# Altium PCB HC01.PcbDoc
Units mil, origin at the board's own origin, x right, y up, seen from the top; angles counter-clockwise.
Board outline 1085.03 x 1490.03 mil, 2 copper layers (Top Layer, Bottom Layer); 8 components, 9 nets, 71 pads, 11 vias.
Unrouted connection lines stored in the file: 2.
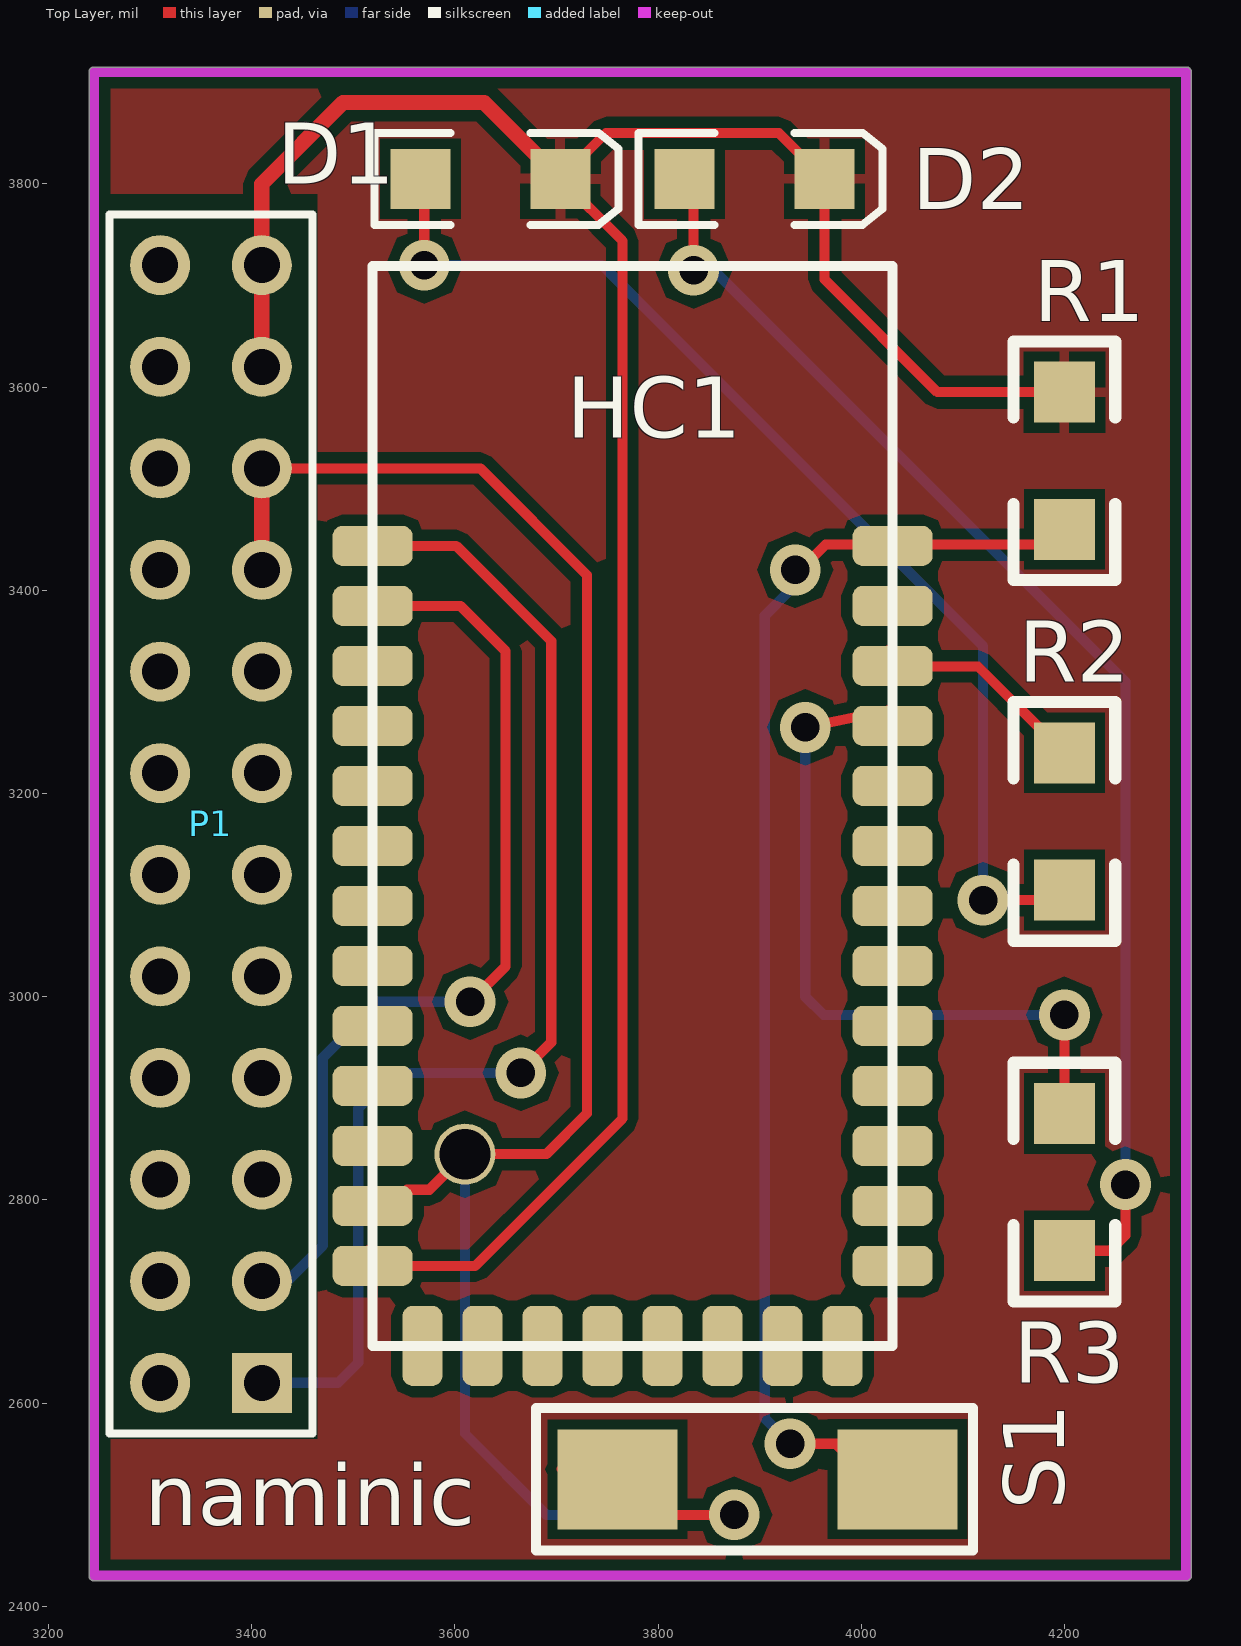
[diagram p0: Top Layer view]
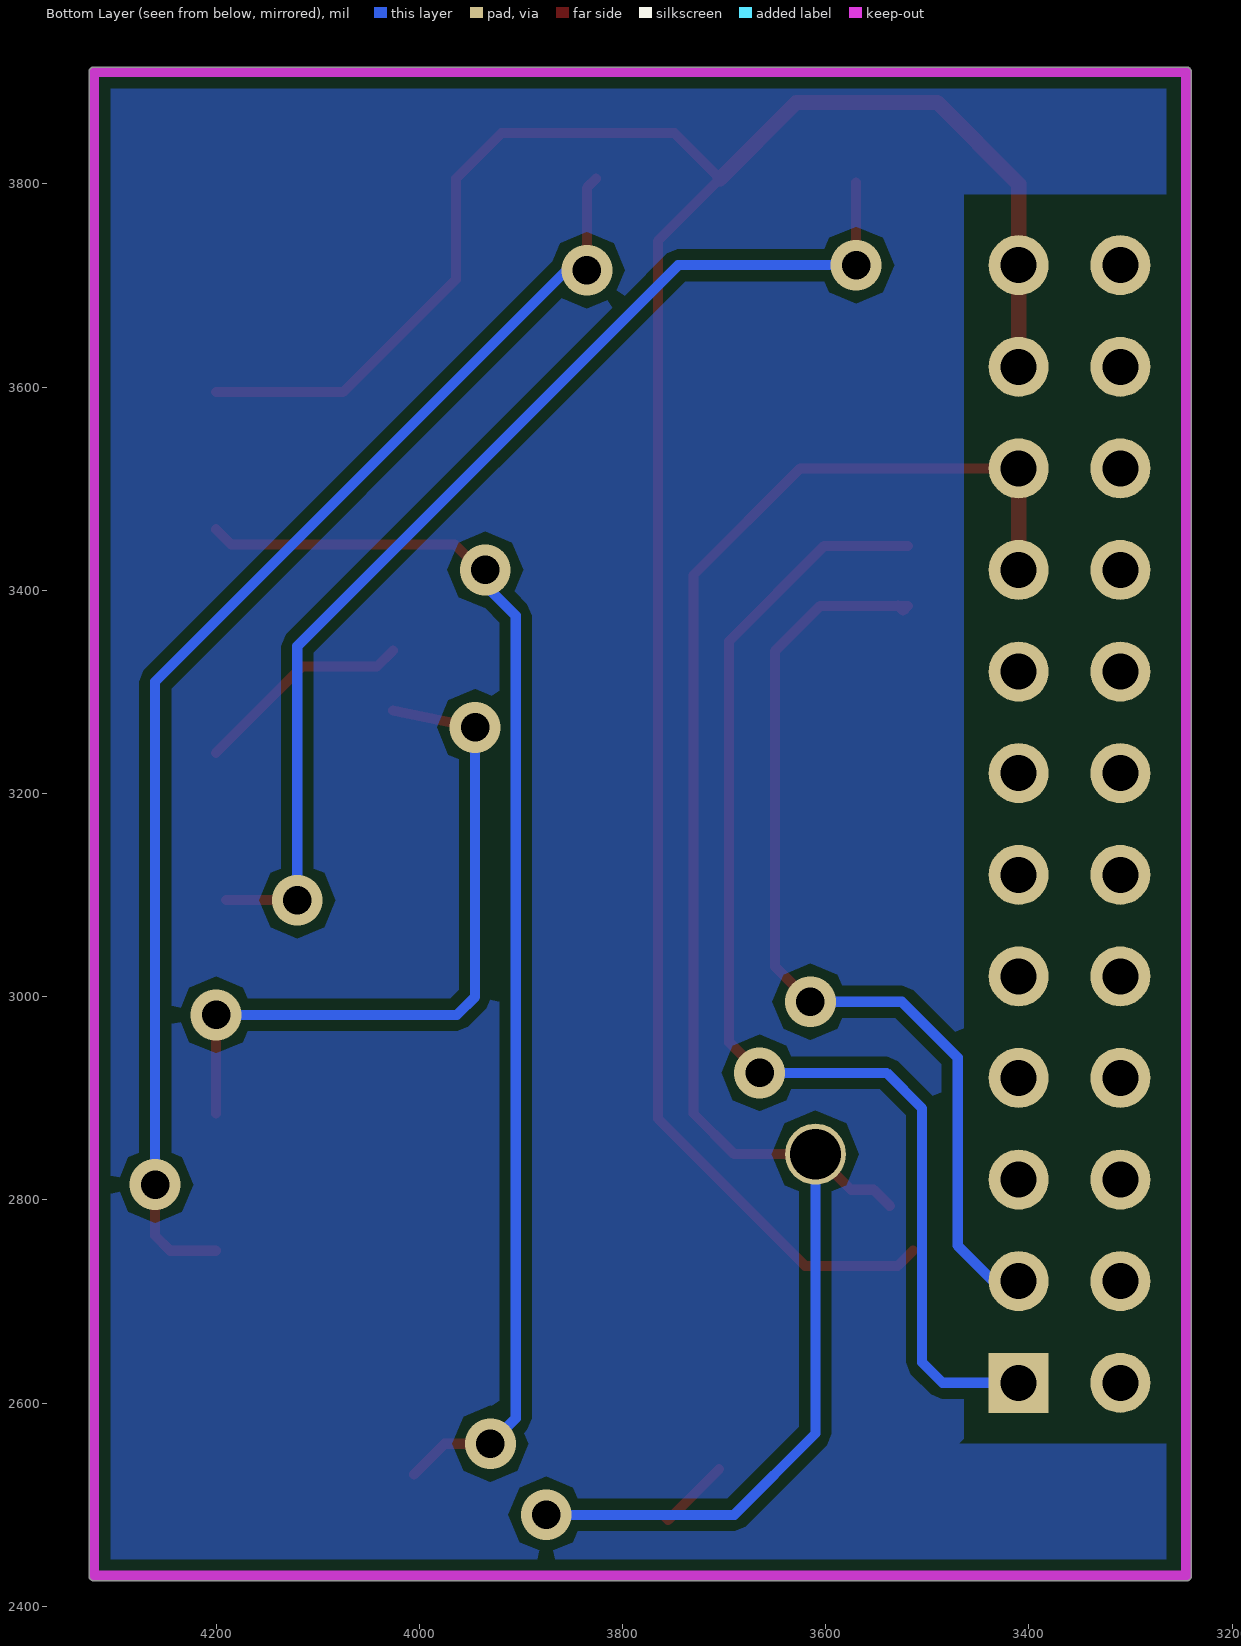
[diagram p1: Bottom Layer view, seen from below]
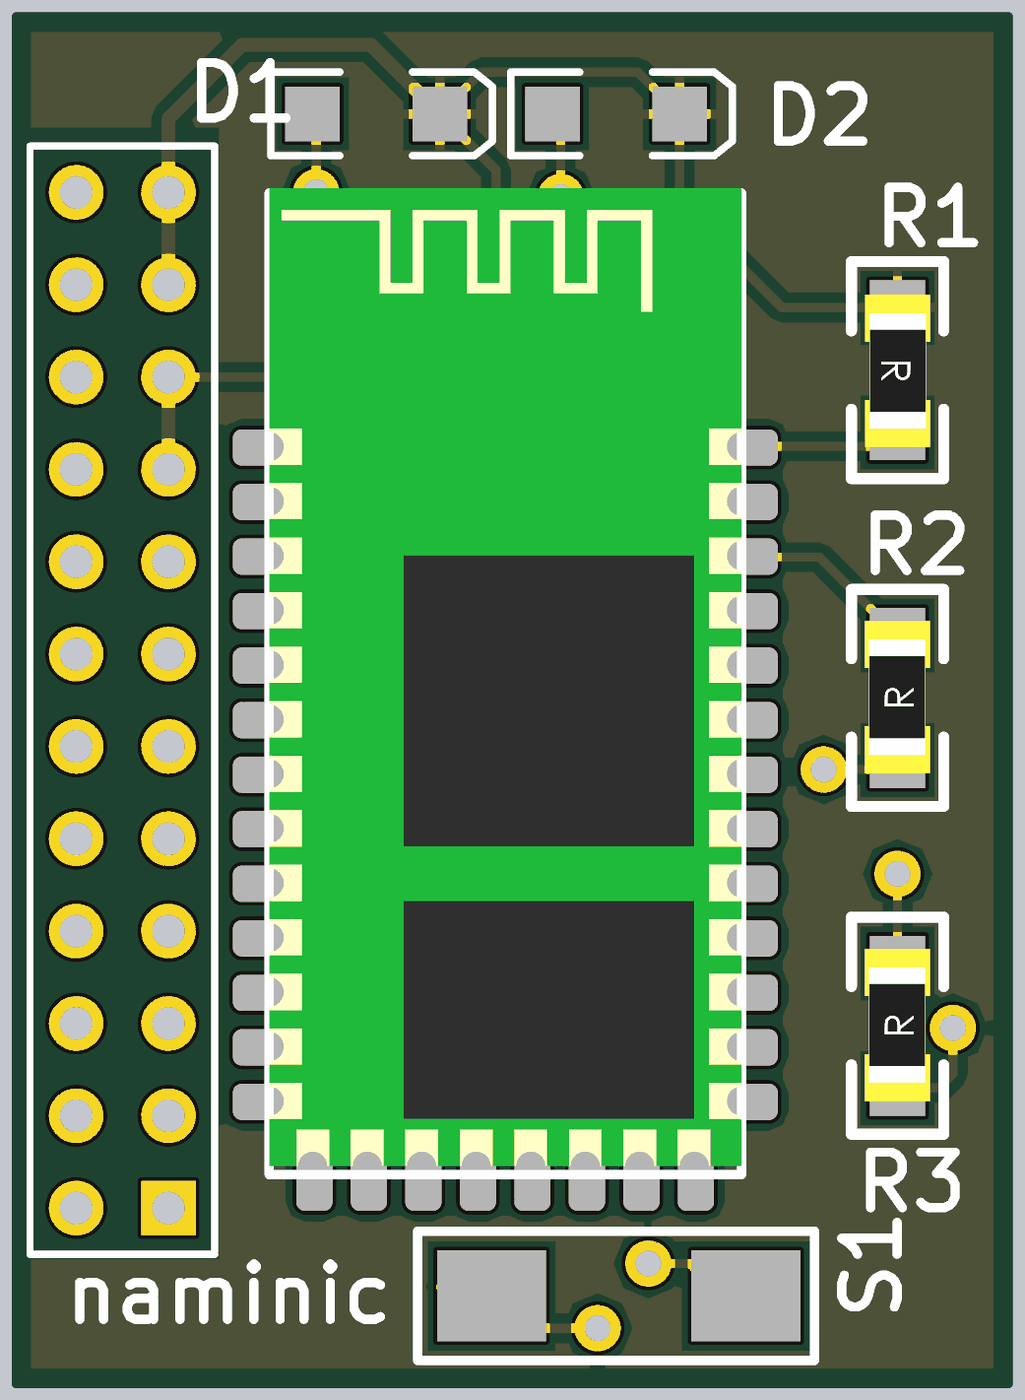
[diagram p2: 3D render of the assembled board from above, using the file's embedded part models]

## Layer stack, top to bottom
Top Layer: signal copper 1.4
Dielectric: dielectric 12.6, FR-4, Dk 4.8
Bottom Layer: signal copper 1.4

## Board outline
3239.99,2430 3239.99,3910 cw(c3245,3910) 3245,3915.01 4320,3915.01 cw(c4320,3910) 4325.02,3910 4325.02,2430 cw(c4320,2430) 4320,2424.99 3245,2424.99 cw(c3245,2430)

## Design rules (kind name [scope] priority, off if disabled: settings)
Clearance [All] p1: gap=10
PolygonConnect [All] p1: connectstyle=Relief reliefconductorwidth=10 reliefentries=4 polygonreliefangle="90 Angle"
RoomDefinition Sheet1 [InComponentClass('Sheet1')] p1: confinementstyle=ConfineIn formatcopy=TRUE lockcomponents=FALSE outline 0,0 2000,0 2000,1000 0,1000
RoutingVias [All] p1: holewidth=28 width=50 viastyle="Through Hole" minholewidth=28 minwidth=50 maxholewidth=28 maxwidth=50
SilkscreenOverComponentPads SilkToSolderMaskClearance [IsPad] p1: minsilkscreentomaskgap=10
SolderMaskExpansion [All] p1: expansion=4
Width [All] p1: maxlimit=10 minlimit=10 preferedwidth=10
27 further rules are at their usual default settings.

## Components (designator, comment, footprint, x,y, rotation, side; value= is the part's Value field where it differs from the comment)
D1 "LED2" 3.2X1.6X1.1 3635,3805 r0 top
D2 "LED2" 3.2X1.6X1.1 3895,3805 r0 top
HC1 "HC-05 Bluetooth" HC-05 3775,3050 r0 top
P1 "Header 12X2" HDR2X12 3410,2620 r90 top
R1 "10K" 1206 4200,3595 r270 top
R2 "180R" 1206 4200,3105 r90 top
R3 "180R" 1206 4200,2750 r90 top
S1 "KEY" SW-SMD 3760,2525 r0 top

## Footprints (in the part's own frame and the unit in brackets; to place one, negate y for a bottom-side part, rotate by r counter-clockwise, add the part's x,y. Pads: shape width x height; smd on the part's side, far side on the other; paste and mask are expansions set on the pad)
3.2X1.6X1.1 [mm] "SMT LED; 2 Flat Leads"
  rect 1.5x1.5 smd: 1(-1.75,0) 2(1.75,0)
  silkscreen extent -2.9,-1.15 3.2,1.15
1206 [mil]
  rect 60x60 smd: 1(0,0) 2(135,0)
  silkscreen extent -50,-50 185,50, body extent -14,-35 151,36, height 25
HC-05 [mm]
  rrect50% 2x1 smd: 1(-6.5,10) 2(-6.5,8.5) 3(-6.5,7) 4(-6.5,5.5) 5(-6.5,4) 6(-6.5,2.5) 7(-6.5,1) 8(-6.5,-0.5) 9(-6.5,-2) 10(-6.5,-3.5) 11(-6.5,-5) 12(-6.5,-6.5) 13(-6.5,-8) 22(6.5,-8) 23(6.5,-6.5) 24(6.5,-5) 25(6.5,-3.5) 26(6.5,-2) 27(6.5,-0.5) 28(6.5,1) 29(6.5,2.5) 30(6.5,4) 31(6.5,5.5) 32(6.5,7) 33(6.5,8.5) 34(6.5,10)
  rrect50% 1x2 smd: 14(-5.254,-10) 15(-3.754,-10) 16(-2.254,-10) 17(-0.754,-10) 18(0.746,-10) 19(2.246,-10) 20(3.746,-10) 21(5.246,-10)
  silkscreen extent -6.5,-10 6.5,17, body extent -6.5,-9.77 6.5,17.13, height 2.5
HDR2X12 [mm] "Connector; Header; 12x2 Position"
  rect 1.5x1.5 hole 0.9: 1(0,0)
  round 1.5 hole 0.9: 2(0,2.54) 3(2.54,0) 4(2.54,2.54) 5(5.08,0) 6(5.08,2.54) 7(7.62,0) 8(7.62,2.54) 9(10.16,0) 10(10.16,2.54) 11(12.7,0) 12(12.7,2.54) 13(15.24,0) 14(15.24,2.54) 15(17.78,0) 16(17.78,2.54) 17(20.32,0) 18(20.32,2.54) 19(22.86,0) 20(22.86,2.54) 21(25.4,0) 22(25.4,2.54) 23(27.94,0) 24(27.94,2.54)
  silkscreen extent -1.27,-1.27 29.21,3.81
SW-SMD [mm]
  rect 3x2.5 smd: 1(0,0) 2(7,0)
  silkscreen extent -2.03,-1.78 8.89,1.78

## Part data
D1 D2: "Typical RED, GREEN, YELLOW, AMBER GaAs LED"
P1: "Header, 12-Pin, Dual row"
R1 R2 R3: library part Res3, "Resistor"
S1: library part SW-SPST, "Single-Pole, Single-Throw Switch"

## Free pads (board coordinates)
  round 60 hole 50: 2(3610,2845)

## Via types
v1: diameter 50, hole 28, Top Layer to Bottom Layer, 11 vias

## Nets (pads, with @x,y where several pads share a name; then routed paths per layer and width w, separated by ;. In a path a pad name is that pad's centre, name@x,y a point inside that pad or via, vN(x,y) a via of type N, cw(c..) or ccw(c..) an arc to the next point about the centre after c; other vN are vias at no path point)
3.3V: HC1.12 P1.17 P1.19 pad.2 S1.1 | length 1990.2
  Top Layer w10: P1.19 3625,3520 3730,3415 3730,2885 3690,2845 pad.2 3575,2810 3552.81,2810 HC1.12@3536.91,2794.09 ; S1.1@3705,2535 3755,2485 3760,2490 v1(3875,2490)
  Top Layer w15: P1.17 P1.19
  Bottom Layer w10: pad.2 3610,2570 3690,2490 v1(3875,2490)
GND: D1.2 D2.2 HC1.13 P1.21 P1.23 R1.1 | length 2483.9
  Top Layer w10: HC1.13@3514.09,2750.04 3529.13,2735 3620,2735 3765,2880 3765,3743.9 D1.2 3748.9,3850 3918.9,3850 D2.2 3963.9,3706.1 4075,3595 R1.1
  Top Layer w15: P1.21 P1.23 3410,3800 3490,3880 3628.9,3880 D1.2
HC01-RX: HC1.2 P1.3 | length 936.2
  Top Layer w10: HC1.2 3605.35,3384.65 3650,3340 3650,3030 v1(3615,2995)
  Bottom Layer w10: P1.3 3435,2720 3470,2755 3470,2940 3525,2995 v1(3615,2995)
HC01-TX: HC1.1 P1.1 | length 1179.9
  Top Layer w10: HC1.1 3601.3,3443.7 3695,3350 3695,2955 v1(3665,2925)
  Bottom Layer w10: P1.1 3485,2620 3505,2640 3505,2890 3540,2925 v1(3665,2925)
NetD1_1: D1.1 R2.1 | length 1106.4
  Top Layer w10: 3570,3720 D1.1@3570,3801.1 ; v1(4120,3095) R2.1@4190,3095
  Bottom Layer w10: 3570,3720 3745,3720 4120,3345 v1(4120,3095)
NetD2_1: D2.1 R3.1 | length 1284
  Top Layer w10: 3835,3715 D2.1@3835,3795 ; R3.1 4245,2750 4260,2765 v1(4260,2815)
  Bottom Layer w10: 3835,3715 3855,3715 4260,3310 v1(4260,2815)
NetHC1_31: HC1.31 R3.2 | length 707
  Top Layer w10: v1(3945,3265) HC1.31@4025.91,3281.54 ; R3.2 v1(4200,2982)
  Bottom Layer w10: v1(3945,3265) 3945,3000 3963,2982 v1(4200,2982)
NetHC1_32: HC1.32 R2.2 | length 215.8
  Top Layer w10: HC1.32@4025.91,3340.59 4041.5,3325 4115,3325 R2.2
NetHC1_34: HC1.34 R1.2 S1.2 | length 1232.6
  Top Layer w10: v1@3915,2560 3975,2560 S1.2@4005,2530 ; v1@3945,3425 3965,3445 4185,3445 R1.2
  Bottom Layer w10: v1(3930,2560) 3905,2585 3905,3375 v1@3930,3400
  other v1: 3935,3420
pads on no net: HC1.3 HC1.4 HC1.5 HC1.6 HC1.7 HC1.8 HC1.9 HC1.10 HC1.11 HC1.14 HC1.15 HC1.16 HC1.17 HC1.18 HC1.19 HC1.20 HC1.21 HC1.22 HC1.23 HC1.24 HC1.25 HC1.26 HC1.27 HC1.28 HC1.29 HC1.30 HC1.33 P1.2 P1.4 P1.5 P1.6 P1.7 P1.8 P1.9 P1.10 P1.11 P1.12 P1.13 P1.14 P1.15 P1.16 P1.18 P1.20 P1.22 P1.24
copper on no net: | length 86.2
  Top Layer w10: 3519.09,3384.65 3523.74,3380 3528.74,3385 ; 3826.1,3805 3835,3796.1
  Bottom Layer w10: v1(3835,3715) v1@3855,3715 ; v1(3835,3715) v1@3855,3715 ; v1(3835,3715) v1@3855,3715
  other v1: 3570,3720

## Polygon pours and split planes (outlines as drawn)
GND on Top Layer "Top Layer-No Net" (solid, pour order 1): 3255,3900 4305,3900 4305,2445 3875,2445 3255,2445 3255,2564.59 3465,2564.59 3465,2649.3 3465,3790.38 3255,3790.38
GND on Bottom Layer "Top Layer-No Net" (solid, pour order 3): 3265,3895 4305,3895 4305,3865 4305,2445 4130.84,2445 3265,2445 3265,2560 3469.02,2560 3464.04,2565 3464.04,3135 3464.04,3790 3265,3790 3265,3895

## Keep-outs
Keep-Out Layer:
  lines w10: 3245,2430 4320,2430 4320,3910 3245,3910 3245,2430

## Silkscreen, mask and mechanical layers (free items; w line width, h text height)
Top Overlay:
  text "naminic" at 3295,2480 h60
Mechanical 1:
  lines w1: 3240,3630 3240,3875